# EAGLE board Addon-mapleCUx_OneWire-RS485-008 (EAGLE 7.6.0)
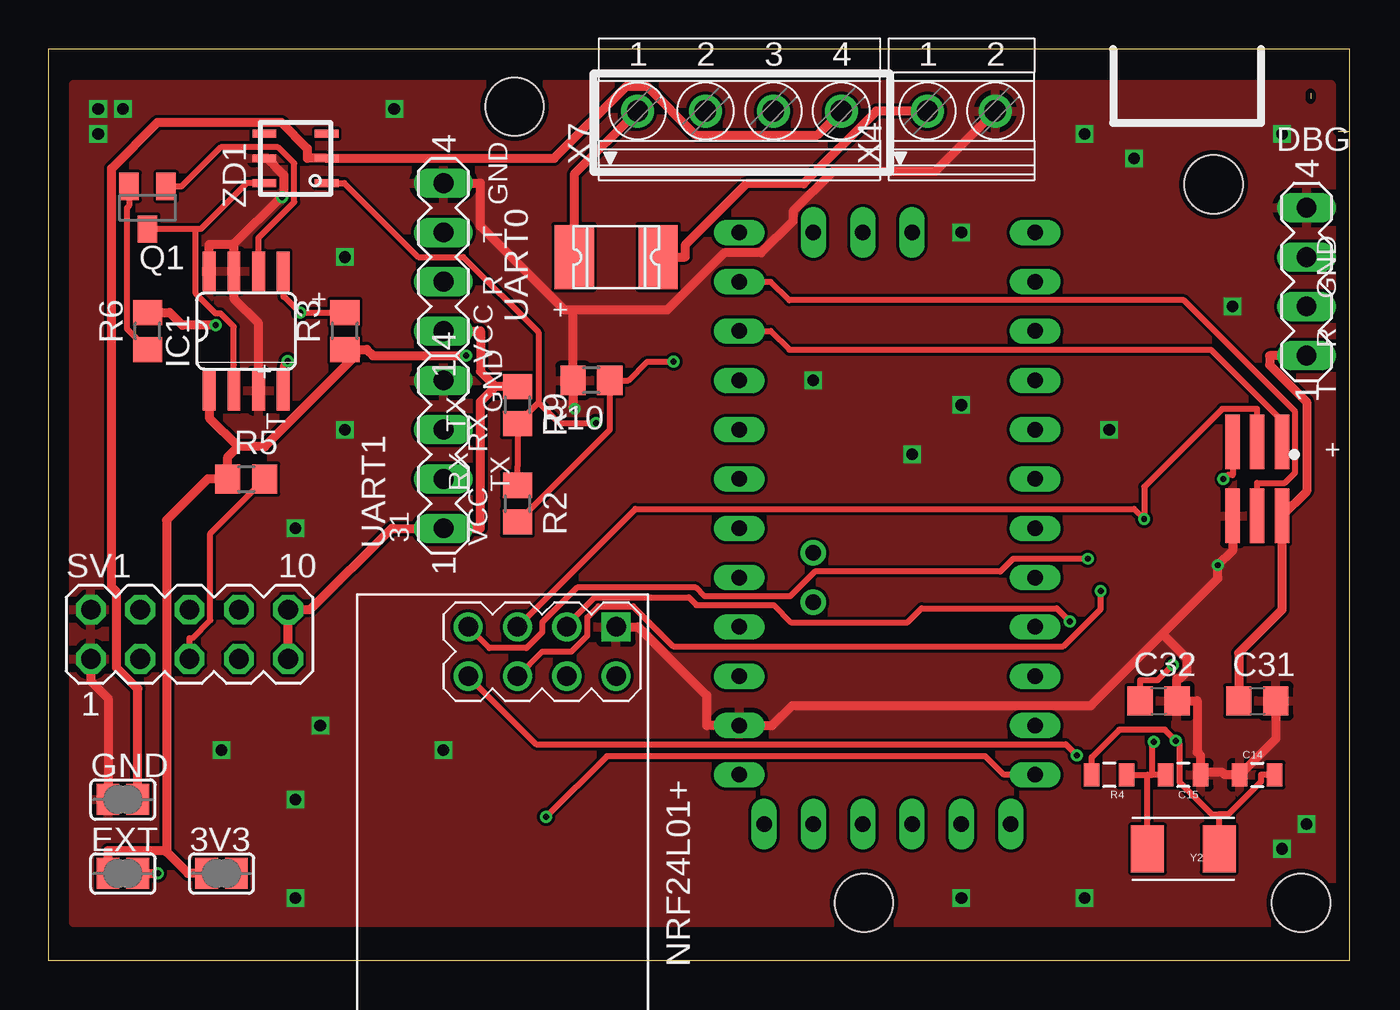
[diagram p0: board, top side]
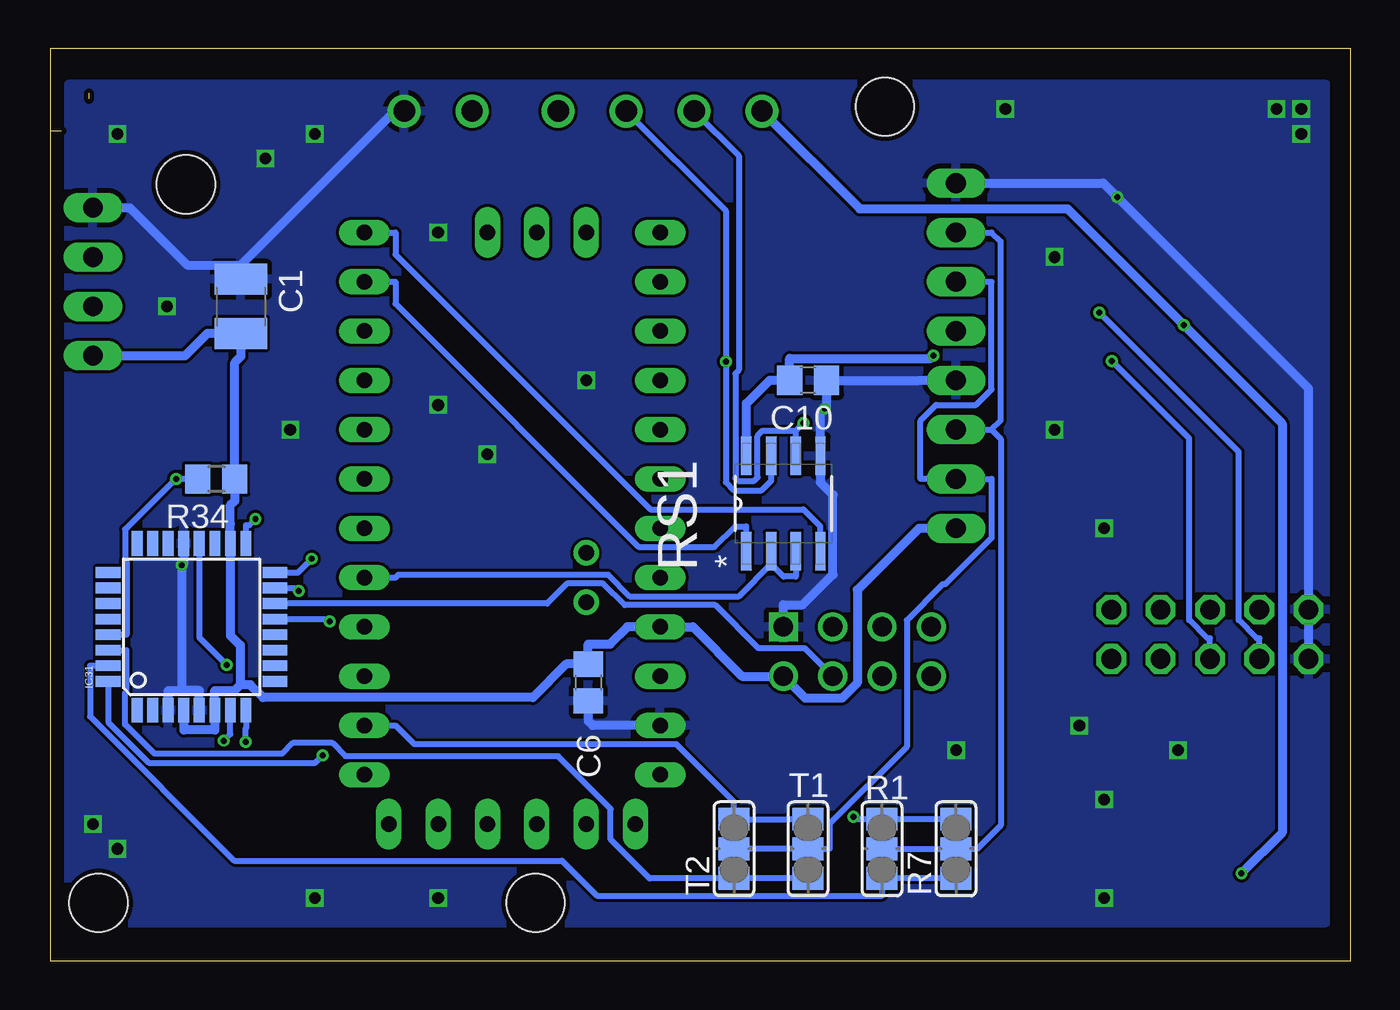
[diagram p1: board, bottom side, seen from below]

Size 67 x 47 mm. Coordinates in mm from the lower left corner, seen from the top.
Outline: 67,47 67,46.24
Outline: 65,44.7 65,44.41
Outline: 66.41,42.75 67,42.75
Outline: 67,47 0,47 0,0 67,0 67,42.75
Outline: 67,47 67,42.75
Copper layers (1*16): Top 0.035mm / dielectric 1.5mm / Bottom 0.035mm
Design rules "SeeedStudio_2layer_DRU_no_angle_20140221": minimum track width 6mil, minimum drill 12mil, track to track 6mil, track to pad 6mil, pad to pad 6mil, via to via 6mil, smd to smd 0mil, copper to edge 10mil, drill to drill 10mil, minimum pad ring 10mil, minimum via ring 6mil, stop-mask expansion 2mil, vias tented up to drill 100mil, thermal gap 10mil
Net classes: 0 default: width 0.305 mm; 1 PWR: width 0.457 mm
Holes 3 mm at 60,40 24,44 42,3 64.5,3

## Footprints (pad centres in the part's own frame; a part is rotated, then mirrored left to right if it is on the bottom)
SJ = smd 1.168 x 1.6: 1 -0.762,0; 2 0.762,0
C1210 = smd 1.6 x 2.7: 1 -1.4,0; 2 1.4,0
C0805 = smd 1.3 x 1.5: 1 -0.95,0; 2 0.95,0
0805 = smd 0.8 x 1.2: 1 -0.9,0; 2 0.9,0
MA04-1 = drill 1.016 long: 1 -3.81,0; 2 -1.27,0; 3 1.27,0; 4 3.81,0
1812L = smd 2.03 x 3.3: P$1 -2.16,0; P$2 2.16,0
SO08 = smd 0.66 x 2.032: 1 -1.905,-3.073; 2 -0.635,-3.073; 3 0.635,-3.073; 4 1.905,-3.073; 5 1.905,3.073; 6 0.635,3.073; 7 -0.635,3.073; 8 -1.905,3.073
TQFP32-08 = smd 1.27 x 0.559: 1 -4.293,2.8; 2 -4.293,2; 3 -4.293,1.2; 4 -4.293,0.4; 5 -4.293,-0.4; 6 -4.293,-1.2; 7 -4.293,-2; 8 -4.293,-2.8; 17 4.293,-2.8; 18 4.293,-2; 19 4.293,-1.2; 20 4.293,-0.4; 21 4.293,0.4; 22 4.293,1.2; 23 4.293,2; 24 4.293,2.8 | smd 0.559 x 1.27: 9 -2.8,-4.293; 10 -2,-4.293; 11 -1.2,-4.293; 12 -0.4,-4.293; 13 0.4,-4.293; 14 1.2,-4.293; 15 2,-4.293; 16 2.8,-4.293; 25 2.8,4.293; 26 2,4.293; 27 1.2,4.293; 28 0.4,4.293; 29 -0.4,4.293; 30 -1.2,4.293; 31 -2,4.293; 32 -2.8,4.293
WIRELESS-NRF24L01 = drill 1 square: 1 -12.7,6.35 | drill 1: 2 -10.16,6.35; 3 -12.7,3.81; 4 -10.16,3.81; 5 -12.7,1.27; 6 -10.16,1.27; 7 -12.7,-1.27; 8 -10.16,-1.27
SOT23 = smd 1 x 1.4: 1 -0.95,-1.1; 2 0.95,-1.1; 3 0,1.1
SJ_2 = smd 1.168 x 1.6: 1 -1.524,0; 2 0,0; 3 1.524,0
R0805 = smd 1.3 x 1.5: 1 -0.95,0; 2 0.95,0
SOIC127P600X175-8N = smd 1.981 x 0.533: 1 -2.464,1.905; 2 -2.464,0.635; 3 -2.464,-0.635; 4 -2.464,-1.905; 5 2.464,-1.905; 6 2.464,-0.635; 7 2.464,0.635; 8 2.464,1.905
MA05-2 = drill 1.016 octagon: 1 -5.08,-1.27; 2 -5.08,1.27; 3 -2.54,-1.27; 4 -2.54,1.27; 5 0,-1.27; 6 0,1.27; 7 2.54,-1.27; 8 2.54,1.27; 9 5.08,-1.27; 10 5.08,1.27
ABK-PRO-MINI = drill 0.8 long: A0 10.16,-3.81; A1 10.16,-6.35; A2 10.16,-8.89; A3 10.16,-11.43; A6 3.81,-21.59; A7 6.35,-21.59; D2 -5.08,-3.81; D3 -5.08,-6.35; D4 -5.08,-8.89; D5 -5.08,-11.43; D6 -5.08,-13.97; D7 -5.08,-16.51; D8 -5.08,-19.05; D9 -5.08,-21.59; D10 10.16,-21.59; D11 10.16,-19.05; D12 10.16,-16.51; D13 10.16,-13.97; DTR 8.89,8.89; GND 10.16,3.81; GND1 -5.08,-1.27; GND2 -3.81,8.89; GND3 -1.27,8.89; GND4 1.27,-21.59; RAW 10.16,6.35; RST 10.16,1.27; RST1 -5.08,1.27; RX1 -5.08,3.81; RX1-1 3.81,8.89; TX0 -5.08,6.35; TX0-1 6.35,8.89; VCC 10.16,-1.27; VCC1 1.27,8.89 | drill 0.8: A4 6.35,-5.08; A5 6.35,-2.54
1751248 = drill 1.1 pad 1.7: 1 -1.75,-0.1; 2 1.75,-0.1
1751264 = drill 1.1 pad 1.7: 1 -5.25,-0.1; 2 -1.75,-0.1; 3 1.75,-0.1; 4 5.25,-0.1
2X03-1.27MM_SMD = smd 0.75 x 2.8: P$1 -1.27,-1.905; P$2 -1.27,1.905; P$3 0,-1.905; P$4 0,1.905; P$5 1.27,-1.905; P$6 1.27,1.905
CRYSTAL-TXC-7A = smd 1.7 x 2.4: P$1 1.85,0; P$2 -1.85,0
TSOC6 = smd 0.406 x 1.219: 1 -1.27,-1.6; 2 0,-1.6; 3 1.27,-1.6; 4 1.27,1.6; 5 0,1.6; 6 -1.27,1.6

## Placement (x,y rotation side)
3V3  [SJ]  8.91,4.51 0 top
C1  4,7  [C1210]  57.17,33.72 270 bottom
C6  22pF  [C0805]  39.28,14.34 270 bottom
C10  22p  [C0805]  27.96,29.91 180 bottom
C14  30pf  [0805]  62.25,9.59 0 top
C15  30pf  [0805]  58.44,9.59 180 top
C31  100n  [C0805]  62.25,13.4 0 top
C32  100n  [C0805]  57.17,13.4 0 top
DBG  [MA04-1]  64.79,34.99 90 top
EXT  [SJ]  3.83,4.51 0 top
F1  1812L  [1812L]  29.23,36.26 0 top
GND  [SJ]  3.83,8.32 0 top
IC1  DS2482  [SO08]  10.18,32.45 0 top
IC31  ATMEGA168-TQFP  [TQFP32-08]  59.71,17.21 90 bottom
NRF24L01+  NRF24L01+  [WIRELESS-NRF24L01]  22.88,4.51 270 top
Q1  BSS84  [SOT23]  5.1,38.8 180 top
R1  [SJ_2]  24.15,5.78 90 bottom
R2  150R  [R0805]  24.15,23.56 270 top
R3  4k7  [R0805]  15.26,32.45 90 top
R4  1M  [0805]  54.63,9.59 180 top
R5  4K7  [R0805]  10.18,24.83 0 top
R6  100  [R0805]  5.1,32.45 90 top
R7  [SJ_2]  20.34,5.78 90 bottom
R9  330R  [R0805]  24.15,28.64 270 top
R10  330R  [R0805]  27.96,29.91 180 top
R34  [R0805]  58.44,24.83 180 bottom
RS1  MAX487ECSA+  [SOIC127P600X175-8N]  29.23,23.56 90 bottom
SV1  [MA05-2]  7.26,16.83 0 top
T1  [SJ_2]  27.96,5.78 90 bottom
T2  [SJ_2]  31.77,5.78 90 bottom
U$1  ABK-PRO-MINI  [ABK-PRO-MINI]  45.74,15.94 180 top
UART0  [MA04-1]  20.34,36.26 90 top
UART1  [MA04-1]  20.34,26.1 90 top
X4  1751248  [1751248]  47.01,43.88 0 top
X7  1751264  [1751264]  35.58,43.88 0 top
X31  M03X2  [2X03-1.27MM_SMD]  62.25,24.83 180 top
Y2  8MHZ  [CRYSTAL-TXC-7A]  58.44,5.78 180 top
ZD1  DS9503P  [TSOC6]  12.72,41.34 90 top

## Library data of the parts
3V3 EXT GND R1 R7 T1 T2 = jumper
C1 C6 C10 C31 C32 R2 R3 R5 R6 R9 R10 R34 = rcl
C14 C15 R4 = doug
DBG SV1 UART0 UART1 = con-lstb; OC_FARNELL: unknown; OC_NEWARK: unknown
F1 = ptc-littlefuse
IC1 ZD1 = 1wire
IC31 = atmel
NRF24L01+ = diy-modules
Q1 = transistor-small-signal
RS1 = Maxim_By_element14_Batch_1; MPN: MAX487ECSA+; OC_FARNELL: 9724532; OC_NEWARK: 68K4803; PACKAGE: SOIC-8; SUPPLIER: Maxim
U$1 = Arduino-clone
X4 = con-phoenix-350; OC_FARNELL: unknown; OC_NEWARK: unknown
X7 = con-phoenix-350; MPN: 1751264; OC_FARNELL: unknown; OC_NEWARK: 10R0934
X31 = mechanics
Y2 = SparkFun-FreqCtrl

## Nets
1W: R2.1 R9.2 RS1.6 X7.2 ZD1.1
2W: R2.2 R10.1 RS1.7 X7.3
CC_CS2: IC1.5 R3.2 SV1.3
CC_IN_2: IC1.4 R5.2 SV1.5
CE-A: RS1.4 U$1.D9
CE-M: IC31.13 NRF24L01+.3
CSN-A: U$1.D10
D2_INT0: IC31.32 NRF24L01+.8
D10_SS: IC31.14 NRF24L01+.4
D11_MOSI: IC31.15 NRF24L01+.6
D12_MISO: IC31.16 NRF24L01+.7
D13_SCK: IC31.17 NRF24L01+.5 X31.P$3
EXT [PWR]: EXT.2 F1.P$1 R6.2 X7.1
GD [PWR]: GND.2 X7.4 ZD1.2
GND [PWR]: C1.1 C6.2 C10.1 C14.1 C15.1 C31.2 C32.2 DBG.4 GND.1 IC1.3 IC1.7 IC1.8 IC31.3 IC31.5 IC31.21 NRF24L01+.1 R10.2 RS1.5 SV1.1 SV1.2 U$1.GND UART0.4 UART1.4 X4.2 X31.P$6 ZD1.5
IRQ-A: RS1.2 RS1.3 U$1.D2
M-RES: IC31.29 R34.2 X31.P$5
MISO1: SV1.6
MISO-A: U$1.D12 X31.P$1
MOSI1: SV1.8
MOSI-A: U$1.D11 X31.P$4
N$3: C14.2 IC31.7 R4.2 Y2.P$2
N$13: C32.1 IC31.20
N$19: C15.2 IC31.8 R4.1 Y2.P$1
N$45 [PWR]: F1.P$2 X4.1
N$47: IC1.6 Q1.1
N$48: IC1.2 Q1.3 ZD1.6
N$52: Q1.2 R6.1
R1-ARD: R1.3 R7.3 U$1.TX0
R1-MY: IC31.31 R1.1 R7.1
RO-A: RS1.1 U$1.D8
RX1: R1.2 R7.2 UART0.3 UART1.3
SCK1: SV1.7
SCK-A: U$1.D13
T1-ARD: T1.3 T2.3 U$1.RX1
T1-MY: IC31.30 T1.1 T2.1
TX1: T1.2 T2.2 UART0.2 UART1.2
VCC [PWR]: C1.2 C6.1 C31.1 DBG.1 IC31.4 IC31.6 IC31.18 NRF24L01+.2 R9.1 R34.1 SV1.9 SV1.10 U$1.VCC UART0.1 UART1.1 X31.P$2
VDD [PWR]: 3V3.1 3V3.2 C10.2 EXT.1 IC1.1 R3.1 R5.1 RS1.8

## Tracks (layer width: path | path; a pad name or v marks a point on that pad's centre or on a via)
1W  (via drill 0.3 pad 0.61)
  Top 0.305: 25.23,28.77 R9.2 24.15,25.47 R2.1 | 25.23,28.77 25.23,32.38 21.35,36.26 19.05,36.26 15.23,40.07 ZD1.1 | 25.23,28.77 26.28,27.72 v28.2,27.72
  Bottom 0.305: X7.2 31.52,41.47 31.52,30.44 31.71,30.26 31.71,24.87 31.56,24.73 30.74,24.73 30.56,24.91 30.56,27.06 30.31,27.32 28.59,27.32 | v28.2,27.72 28.59,27.32 | RS1.6 28.59,27.32
2W  (via drill 0.3 pad 0.61)
  Top 0.305: v32.19,30.88 30.83,30.88 29.87,29.91 R10.1 28.91,27.37 R2.2
  Bottom 0.305: X7.3 32.19,38.64 v32.19,30.88 32.19,24.67 31.77,24.24 30.35,24.24 29.87,24.73 RS1.7
CC_CS2  (via drill 0.3 pad 0.61)
  Top 0.305: R3.2 v12.96,33.4 12.16,34.2 12.09,34.2 IC1.5
  Bottom 0.305: SV1.3 4.72,16.63 4.85,16.63 5.79,17.56 5.79,26.23 v12.96,33.4
CC_IN_2  (via drill 0.3 pad 0.61)
  Top 0.305: v12.31,30.9 12.11,30.7 12.09,30.7 IC1.4 | SV1.5 7.26,16.63 7.39,16.63 8.33,17.56 8.33,22.03 R5.2
  Bottom 0.305: SV1.5 7.26,16.63 7.39,16.63 8.33,17.56 8.33,26.91 v12.31,30.9
CE-A
  Bottom 0.305: RS1.4 27.33,22.39 28.2,23.27 36.09,23.27 49.21,36.39 49.21,37.53 U$1.D9
CE-M  (via drill 0.3 pad 0.61)
  Top 0.305: NRF24L01+.3 26.69,17.3 28.12,18.73 32.97,18.73 33.37,18.33 37.35,18.33 38.23,17.45 44.25,17.45 44.96,18.17 51.92,18.17 v52.6,17.49
  Bottom 0.305: IC31.13 52.71,17.61 v52.6,17.49
D2_INT0  (via drill 0.3 pad 0.61)
  Top 0.305: NRF24L01+.8 25.11,11.17 52.38,11.17 v52.96,10.59
  Bottom 0.305: IC31.32 64,12.3 61.91,10.21 53.34,10.21 v52.96,10.59
D10_SS
  Bottom 0.305: NRF24L01+.4 28.12,16.1 30.5,16.1 32.73,18.33 37.39,18.33 38.51,19.44 40.37,19.44 41.4,18.41 IC31.14
D11_MOSI  (via drill 0.3 pad 0.61)
  Top 0.305: NRF24L01+.6 25.42,15.94 26.93,15.94 27.75,16.76 27.75,17.7 28.32,18.27 30.11,18.27 32.17,16.21 52.26,16.21 54.19,18.13 v54.19,19.06
  Bottom 0.305: IC31.15 54.34,19.21 v54.19,19.06
D12_MISO  (via drill 0.3 pad 0.61)
  Top 0.305: v53.52,20.72 49.68,20.72 49.02,20.06 39.46,20.06 38.19,18.79 33.79,18.79 33.34,19.24 27.22,19.24 25.42,17.44 25.42,16.93 24.61,16.11 22.71,16.11 NRF24L01+.7
  Bottom 0.305: IC31.16 54.23,20.01 v53.52,20.72
D13_SCK  (via drill 0.3 pad 0.61)
  Top 0.305: NRF24L01+.5 30.23,23.29 55.89,23.29 v56.42,22.76 56.42,24.42 60.44,28.44 62.25,28.44 X31.P$3
  Bottom 0.305: IC31.17 56.91,22.44 56.74,22.44 v56.42,22.76
EXT  (via drill 0.3 pad 0.61)
  Top 0.457: EXT.2 v5.64,4.51 | R6.2 6.23,33.4 6.88,32.75 v8.6,32.75 | X7.1 27.07,40.52 F1.P$1
  Bottom 0.457: v5.64,4.51 3.54,6.61 3.54,27.68 v8.6,32.75 14.6,38.74 25.29,38.74 X7.1
GD
  Top 0.457: GND.2 4.59,14.02 3.51,15.11 3.51,19 3.24,19.27 3.24,40.82 5.62,43.19 11.98,43.19 13.33,41.85 13.33,41.34 ZD1.2 26.04,41.34 29.76,45.06 30.81,45.06 33.33,42.54 39.59,42.54 X7.4
GND  (via drill 0.3 pad 0.61, 0.6)
  Top 0.457: IC1.3 10.81,30.77 10.81,32.86 9.55,34.13 IC1.7 9.55,36.92 | 9.55,36.92 11.97,39.35 v12.04,39.35 12.11,39.42 12.11,40.48 11.25,41.34 ZD1.5 | 9.55,36.92 8.27,36.92 IC1.8 | SV1.1 2.18,14.42 3.07,13.53 GND.1 | 59.34,9.74 60.42,9.74 60.57,9.59 C14.1 63.2,11.44 C31.2 | 59.34,9.74 59.34,10.57 59.15,10.76 59.15,13.4 C32.2 58.12,14.53 58.25,14.53 58.65,14.93 58.65,15.56 57.36,16.84 | C15.1 59.34,9.74 | 57.36,16.84 60.22,19.7 v60.22,20.39 | v60.22,20.39 | 57.36,16.84 53.68,13.16 38.3,13.16 37.27,12.13 U$1.GND 33.89,12.13 33.89,13.68 30.37,17.21 NRF24L01+.1 | 27.01,33.53 26.56,33.53 22.24,37.85 22.24,40.07 UART0.4 | X4.2 45.65,40.67 40.39,40.67 38.34,38.62 38.34,38.12 36.69,36.48 34.81,36.48 31.86,33.53 27.01,33.53 | 27.01,33.53 27.01,31.04 R10.2 27.01,28.54 v27.1,28.44 | X31.P$6 60.98,21.14 v60.22,20.39
  Bottom 0.457: X4.2 49.25,43.78 57.17,35.85 | DBG.4 62.89,38.8 59.94,35.85 57.17,35.85 | C1.1 57.17,35.85 | UART1.4 22.24,29.91 R10.2 27.01,28.54 v27.1,28.44 27.33,28.22 RS1.5 27.33,24.65 26.68,24 26.68,19.91 28.24,18.34 29.23,18.34 NRF24L01+.1 | SV1.1 SV1.2 2.18,29.49 v12.04,39.35 12.76,40.07 UART0.4 | IC31.21 60.11,20.49 60.12,20.49 v60.22,20.39 60.22,13.95 | C6.2 39.28,12.36 39.05,12.13 U$1.GND | IC31.5 59.31,13.93 60.2,13.93 60.22,13.95 | IC31.3 60.91,13.93 60.24,13.93 60.22,13.95
  other vias: 12.72,3.24 12.72,8.32 8.91,10.86 12.72,22.29 15.26,27.37 2.56,43.88 3.83,43.88 2.56,42.61 17.8,43.88 15.26,36.26 39.39,29.91 47.01,28.64 44.47,26.1 47.01,3.24 20.34,10.86 53.36,3.24 63.52,5.78 64.79,7.05 54.63,27.37 55.9,41.34 53.36,42.61 63.52,42.61 60.98,33.72 47.01,37.53 13.99,12.13
  pour Bottom: 1.29,1.97 1.29,45.15 66.06,45.15 66.06,1.97
  pour Top: 1.29,1.97 1.29,45.15 66.06,45.15 66.06,1.97
IRQ-A
  Bottom 0.305: U$1.D2 49.21,19.75 49.06,19.9 38.26,19.9 37.14,18.79 31.53,18.79 29.87,20.45 | RS1.3 28.59,19.8 29.22,19.8 29.87,20.45 | RS1.2 29.87,20.45
M-RES  (via drill 0.3 pad 0.61)
  Top 0.305: X31.P$5 60.98,25.03 60.71,25.03 v60.51,24.83
  Bottom 0.305: IC31.29 63.06,16.81 63.06,20.56 63.13,20.63 63.13,22.23 60.53,24.83 v60.51,24.83 R34.2
MISO-A
  Top 0.305: U$1.D12 37.19,32.45 38.15,31.49 59.86,31.49 63.52,27.83 X31.P$1
MOSI-A
  Top 0.305: U$1.D11 37.19,34.99 38.15,34.03 58.47,34.03 64.2,28.3 64.2,25.16 63.67,24.63 62.25,24.63 X31.P$4
N$3  (via drill 0.3 pad 0.61)
  Top 0.305: R4.2 53.73,10.5 55.14,11.91 57.5,11.91 v58.06,11.35 58.25,11.16 58.25,9.22 59.91,7.55 60.29,7.55 | Y2.P$2 60.29,7.55 | C14.2 62.44,9.59 62.44,9.24 60.76,7.55 60.29,7.55
  Bottom 0.305: v58.06,11.35 57.71,11.7 IC31.7
N$13  (via drill 0.3 pad 0.61)
  Top 0.305: v57.91,15.26 57.11,14.45 56.22,14.45 C32.1
  Bottom 0.305: IC31.20 59.31,16.66 v57.91,15.26
N$19  (via drill 0.3 pad 0.61)
  Top 0.305: 56.83,9.59 56.83,11.2 v56.93,11.3 | 56.59,9.59 56.83,9.59 | R4.1 56.59,9.59 | 56.59,9.59 56.59,7.29 Y2.P$1 | C15.2 56.83,9.59
  Bottom 0.305: IC31.8 56.91,11.98 56.93,11.96 v56.93,11.3
N$45
  Top 0.457: F1.P$2 32.79,36.26 32.79,36.87 35.95,40.03 38.89,40.03 42.63,43.78 X4.1
N$47
  Top 0.305: IC1.6 10.81,37.26 12.65,39.09 12.65,41.09 11.82,41.91 8.87,41.91 6.85,39.9 Q1.1
N$48
  Top 0.305: 7.58,37.7 7.58,34.38 8.6,33.36 8.86,33.36 9.55,32.67 9.55,30.7 IC1.2 | 7.58,37.7 Q1.3 | 7.58,37.7 7.84,37.7 10.2,40.07 ZD1.6
N$52
  Top 0.305: Q1.2 4.15,38.9 4.05,38.79 4.05,32.55 R6.1
R1-ARD  (via drill 0.3 pad 0.61)
  Top 0.305: v25.62,7.42 28.75,10.55 48.25,10.55 49.21,9.59 U$1.TX0
  Bottom 0.305: v25.62,7.42 25.51,7.3 25.26,7.3 R1.3 R7.3
R1-MY
  Bottom 0.305: IC31.31 64.94,15.21 64.94,12.6 57.51,5.16 40.63,5.16 38.84,3.37 24.15,3.37 R1.1 R7.1
RO-A
  Bottom 0.305: RS1.1 31.14,22.39 31.71,22.39 32.77,21.33 36.69,21.33 49.21,33.85 49.21,34.99 U$1.D8
RX1
  Bottom 0.305: 18.51,27.37 18.04,27.85 18.04,37.05 18.51,37.53 UART0.3 | 18.51,27.37 18.04,26.9 18.04,6.98 19.23,5.78 R7.2 R1.2 | UART1.3 18.51,27.37
T1-ARD
  Bottom 0.305: U$1.RX1 49.21,12.13 48.25,11.17 34.75,11.17 31.77,8.19 T2.3 29.06,7.3 T1.3
T1-MY
  Bottom 0.305: IC31.30 63.06,16.01 63.06,13.86 63.13,13.79 63.13,12.19 61.62,10.67 55.05,10.67 54.5,11.22 52.45,11.22 51.78,10.55 40.83,10.55 38.12,7.84 38.12,6.26 36.12,4.26 T2.1 T1.1
TX1
  Bottom 0.305: UART0.2 18.51,34.99 18.51,29.44 19.31,28.64 21.37,28.64 22.17,27.84 22.17,24.83 UART1.2 18.51,24.83 18.51,21.79 20.91,19.4 21.03,19.4 22.88,17.55 22.88,11.03 26.85,7.06 26.85,5.78 T1.2 T2.2
VCC
  Top 0.457: C31.1 61.3,15.87 63.52,18.09 X31.P$2 64.79,24.2 64.79,28.8 62.89,30.71 62.89,31.18 DBG.1 | UART0.1 22.24,32.45 22.24,30.36 23.02,29.59 | R9.1 23.02,29.59 | 23.02,29.59 22.24,28.82 22.24,22.29 UART1.1 17.67,22.29 13.48,18.1 SV1.10 SV1.9
  Bottom 0.457: DBG.1 60.04,31.18 58.9,32.32 C1.2 57.17,31.14 57.49,30.82 R34.1 57.49,24.33 57.49,23.7 57.71,23.48 57.71,22.52 IC31.18 57.71,16.77 57.2,16.26 57.2,14.23 | 57.2,14.23 56.69,14.23 56.03,13.57 42.13,13.57 40.41,15.3 C6.1 39.28,16.33 38.15,16.33 37.27,17.21 U$1.VCC 33.89,17.21 31.35,14.67 NRF24L01+.2 28.09,13.53 26.22,13.53 25.42,14.33 25.42,19.11 22.24,22.29 UART1.1 | IC31.4 60.11,11.9 58.51,11.9 IC31.6 58.51,13.93 57.49,13.93 57.2,14.23
VDD  (via drill 0.3 pad 0.61)
  Top 0.457: 6.07,5.69 6.07,5.62 7.18,4.51 3V3.1 3V3.2 | 9.76,26.49 9.23,25.96 R5.1 8.2,24.83 6.07,22.7 6.07,5.69 | 15.83,31.5 15.83,31.18 11.13,26.49 9.76,26.49 | 9.76,26.49 8.27,27.98 IC1.1 | 6.07,5.69 3.07,5.69 EXT.1 | 15.83,31.5 16.39,31.5 16.71,31.18 v21.5,31.18 | R3.1 15.83,31.5
  Bottom 0.457: v21.5,31.18 21.64,31.04 28.91,31.04 C10.2 29.94,29.91 31.14,28.72 RS1.8

## Text on the board
tNames: GND | T | R | + | GND | + | GND | R | VCC | + | T | T | TX | + | RX | RX | TX | 31 | VCC
bNames: Ant3